# Altium PCB KUOZHAN.PCBDOC (part 12 of 21)
Units mm, origin at the board's own origin, x right, y up, seen from the top; angles counter-clockwise.
Board outline 165.51 x 116.38 mm, 2 copper layers (Top Layer, Bottom Layer); 171 components, 245 nets, 894 pads, 298 vias.
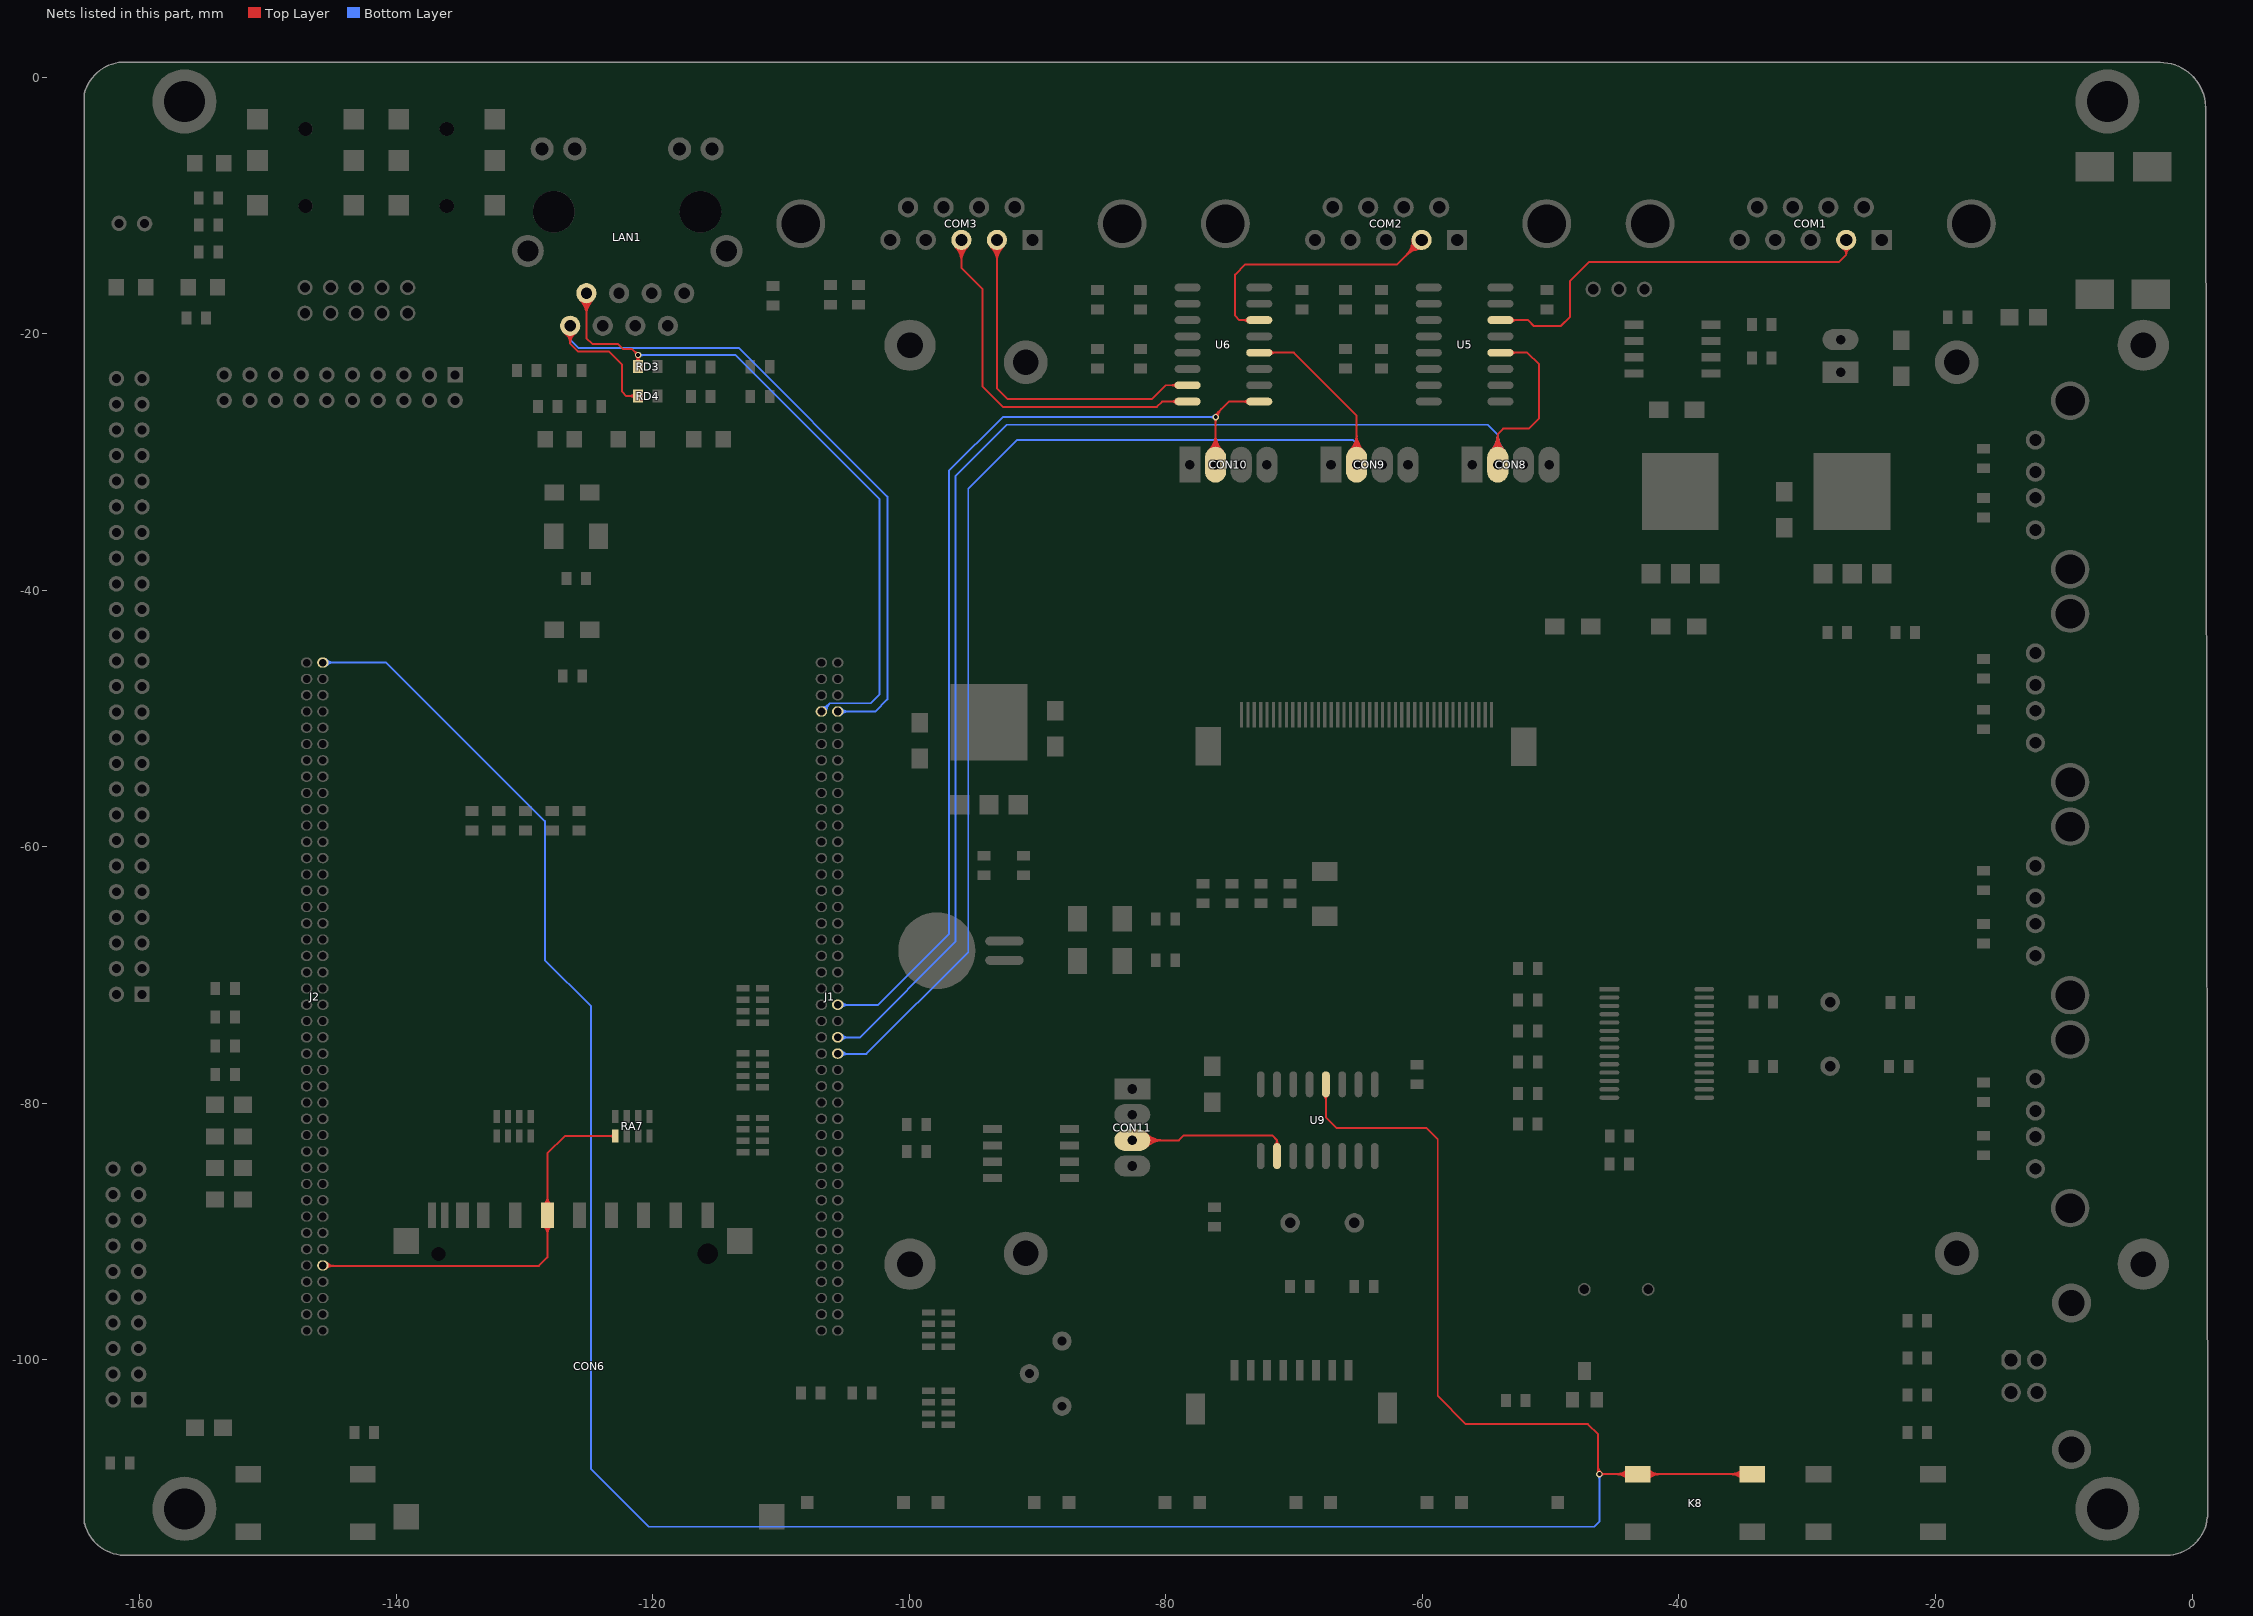
[diagram p12: the nets of this part, all layers, seen from the top]

## Via types
v1: diameter 0.5, hole 0.3, Top Layer to Bottom Layer, 272 vias
v2: diameter 0.6, hole 0.3, Top Layer to Bottom Layer, 24 vias
v3: diameter 0.9, hole 0.9, Top Layer to Bottom Layer, 2 vias

## Nets (pads, with @x,y where several pads share a name; then routed paths per layer and width w, separated by ;. In a path a pad name is that pad's centre, name@x,y a point inside that pad or via, vN(x,y) a via of type N, cw(c..) or ccw(c..) an arc to the next point about the centre after c; other vN are vias at no path point) (continued)
RSRXD2: COM3.3 U6.8 | length 65.3
  Top Layer w0.15: COM3.3@-95.928,-12.692 -95.928,-14.872 -94.3,-16.5 -94.3,-24.1 -92.7,-25.7 -80.7,-25.7 -80.29,-25.29 U6.8@-78.3,-25.29 ; COM3.3@-96.431,-13.196 cw(c-97.647,-14.412) -95.928,-14.412 ; COM3.3@-96.431,-13.196 cw(c-97.647,-14.412) -95.928,-14.412 ; COM3.3@-96.431,-13.196 cw(c-97.647,-14.412) -95.928,-14.412 ; COM3.3@-96.431,-13.196 cw(c-97.647,-14.412) -95.928,-14.412 ; COM3.3@-96.431,-13.196 cw(c-97.647,-14.412) -95.928,-14.412 ; COM3.3@-96.325,-13.09 cw(c-97.285,-14.05) -95.928,-14.05 ; COM3.3@-96.325,-13.09 cw(c-97.285,-14.05) -95.928,-14.05 ; COM3.3@-96.325,-13.09 cw(c-97.285,-14.05) -95.928,-14.05 ; COM3.3@-96.325,-13.09 cw(c-97.285,-14.05) -95.928,-14.05 ; COM3.3@-96.325,-13.09 cw(c-97.285,-14.05) -95.928,-14.05 ; COM3.3@-96.219,-12.984 cw(c-96.923,-13.688) -95.928,-13.688 ; COM3.3@-96.219,-12.984 cw(c-96.923,-13.688) -95.928,-13.688 ; COM3.3@-96.219,-12.984 cw(c-96.923,-13.688) -95.928,-13.688 ; COM3.3@-96.219,-12.984 cw(c-96.923,-13.688) -95.928,-13.688 ; COM3.3@-96.219,-12.984 cw(c-96.923,-13.688) -95.928,-13.688 ; -95.928,-14.412 cw(c-94.208,-14.412) COM3.3@-95.424,-13.196 ; -95.928,-14.412 cw(c-94.208,-14.412) COM3.3@-95.424,-13.196 ; -95.928,-14.412 cw(c-94.208,-14.412) COM3.3@-95.424,-13.196 ; -95.928,-14.412 cw(c-94.208,-14.412) COM3.3@-95.424,-13.196 ; -95.928,-14.412 cw(c-94.208,-14.412) COM3.3@-95.424,-13.196 ; -95.928,-14.05 cw(c-94.57,-14.05) COM3.3@-95.53,-13.09 ; -95.928,-14.05 cw(c-94.57,-14.05) COM3.3@-95.53,-13.09 ; -95.928,-14.05 cw(c-94.57,-14.05) COM3.3@-95.53,-13.09 ; -95.928,-14.05 cw(c-94.57,-14.05) COM3.3@-95.53,-13.09 ; -95.928,-14.05 cw(c-94.57,-14.05) COM3.3@-95.53,-13.09 ; -95.928,-13.688 cw(c-94.932,-13.688) COM3.3@-95.636,-12.984 ; -95.928,-13.688 cw(c-94.932,-13.688) COM3.3@-95.636,-12.984 ; -95.928,-13.688 cw(c-94.932,-13.688) COM3.3@-95.636,-12.984 ; -95.928,-13.688 cw(c-94.932,-13.688) COM3.3@-95.636,-12.984 ; -95.928,-13.688 cw(c-94.932,-13.688) COM3.3@-95.636,-12.984 ; -79.566,-25.29 cw(c-79.566,-25.845) U6.8@-79.174,-25.452 ; -79.566,-25.29 ccw(c-79.566,-24.735) U6.8@-79.174,-25.128 ; -79.566,-25.29 cw(c-79.566,-25.845) U6.8@-79.174,-25.452 ; -79.566,-25.29 ccw(c-79.566,-24.735) U6.8@-79.174,-25.128 ; -79.566,-25.29 cw(c-79.566,-25.845) U6.8@-79.174,-25.452 ; -79.566,-25.29 ccw(c-79.566,-24.735) U6.8@-79.174,-25.128 ; -79.566,-25.29 cw(c-79.566,-25.845) U6.8@-79.174,-25.452 ; -79.566,-25.29 ccw(c-79.566,-24.735) U6.8@-79.174,-25.128 ; -79.566,-25.29 ccw(c-79.566,-24.735) U6.8@-79.174,-25.128 ; -79.566,-25.29 cw(c-79.566,-25.845) U6.8@-79.174,-25.452
RST_KEY: J2.2 K8.1 K8.2 U9.12 | length 246.7
  Top Layer w0.15: U9.12@-67.682,-79.386 cw(c-68.075,-79.778) -67.52,-79.778 cw(c-66.965,-79.778) U9.12@-67.358,-79.386 ; U9.12@-67.52,-78.512 -67.52,-81.08 -66.7,-81.9 -59.7,-81.9 -58.8,-82.8 -58.8,-102.8 -56.6,-105 -47.1,-105 -46.3,-105.8 -46.3,-108.9 K8.1@-43.2,-108.9 K8.2@-34.275,-108.9 ; -46.3,-108.598 ccw(c-45.898,-108.598) v1@-46.182,-108.882 ; -46.3,-108.236 ccw(c-45.536,-108.236) -46.076,-108.776 ccw(c-45.778,-108.478) -45.778,-108.9 ccw(c-45.778,-109.322) v1@-46.076,-109.024 ; K8.1@-43.957,-109.307 ccw(c-44.938,-110.288) -44.938,-108.9 ccw(c-44.938,-107.512) K8.1@-43.957,-108.493 ; K8.1@-43.851,-109.201 ccw(c-44.576,-109.926) -44.576,-108.9 ccw(c-44.576,-107.874) K8.1@-43.851,-108.599 ; K8.1@-43.744,-109.094 ccw(c-44.214,-109.564) -44.214,-108.9 ccw(c-44.214,-108.236) K8.1@-43.744,-108.706 ; K8.1@-42.656,-109.094 cw(c-42.186,-109.564) -42.186,-108.9 cw(c-42.186,-108.236) K8.1@-42.656,-108.706 ; K8.1@-42.549,-109.201 cw(c-41.824,-109.926) -41.824,-108.9 cw(c-41.824,-107.874) K8.1@-42.549,-108.599 ; K8.1@-42.443,-109.307 cw(c-41.462,-110.288) -41.462,-108.9 cw(c-41.462,-107.512) K8.1@-42.443,-108.493 ; K8.2@-35.031,-109.307 ccw(c-36.013,-110.288) -36.013,-108.9 ccw(c-36.013,-107.512) K8.2@-35.031,-108.493 ; K8.2@-34.925,-109.201 ccw(c-35.651,-109.926) -35.651,-108.9 ccw(c-35.651,-107.874) K8.2@-34.925,-108.599 ; K8.2@-34.819,-109.094 ccw(c-35.289,-109.564) -35.289,-108.9 ccw(c-35.289,-108.236) K8.2@-34.819,-108.706
  Bottom Layer w0.15: J2.2@-145.703,-45.638 -140.762,-45.638 -128.4,-58 -128.4,-68.838 -124.8,-72.438 -124.8,-108.5 -120.3,-113 -46.6,-113 -46.2,-112.6 v1(-46.2,-108.9) ; v1@-46.324,-109.024 cw(c-46.622,-109.322) -46.2,-109.322 cw(c-45.778,-109.322) v1@-46.076,-109.024 ; J2.2@-145.579,-45.762 cw(c-145.28,-46.061) J2.2@-145.28,-45.638 ; J2.2@-145.579,-45.762 cw(c-145.28,-46.061) J2.2@-145.28,-45.638 ; J2.2@-145.579,-45.762 cw(c-145.28,-46.061) J2.2@-145.28,-45.638 ; J2.2@-145.579,-45.515 ccw(c-145.28,-45.216) J2.2@-145.28,-45.638 ; J2.2@-145.579,-45.515 ccw(c-145.28,-45.216) J2.2@-145.28,-45.638 ; J2.2@-145.579,-45.515 ccw(c-145.28,-45.216) J2.2@-145.28,-45.638 ; J2.2@-145.473,-45.868 cw(c-144.918,-46.423) -144.918,-45.638 ; J2.2@-145.473,-45.868 cw(c-144.918,-46.423) -144.918,-45.638 ; J2.2@-145.473,-45.868 cw(c-144.918,-46.423) -144.918,-45.638 ; J2.2@-145.473,-45.409 ccw(c-144.918,-44.854) -144.918,-45.638 ; J2.2@-145.473,-45.409 ccw(c-144.918,-44.854) -144.918,-45.638 ; J2.2@-145.473,-45.409 ccw(c-144.918,-44.854) -144.918,-45.638 ; J2.2@-145.529,-45.763 cw(c-145.228,-46.064) -145.228,-45.638 ccw(c-145.228,-46.064) J2.2@-145.529,-45.763 ; J2.2@-145.529,-45.516 ccw(c-145.233,-45.219) -145.233,-45.638 cw(c-145.233,-45.219) J2.2@-145.529,-45.516 ; J2.2@-145.423,-45.869 cw(c-144.866,-46.426) -144.866,-45.638 ccw(c-144.866,-46.426) J2.2@-145.423,-45.869 ; J2.2@-145.423,-45.41 ccw(c-144.871,-44.857) -144.871,-45.638 cw(c-144.871,-44.857) J2.2@-145.423,-45.41
RSTXD0: COM1.2 U5.14 | length 48.4
  Top Layer w0.15: U5.14@-53.912,-18.94 -51.76,-18.94 -51.3,-19.4 -49.2,-19.4 -48.5,-18.7 -48.5,-15.9 -47,-14.4 -27.5,-14.4 -26.959,-13.859 ; COM1.2@-26.959,-12.692 -26.959,-13.859 ; U5.14@-53.038,-19.102 cw(c-52.646,-19.495) -52.646,-18.94 ; U5.14@-53.038,-19.102 cw(c-52.646,-19.495) -52.646,-18.94 ; U5.14@-53.038,-19.102 cw(c-52.646,-19.495) -52.646,-18.94 ; U5.14@-53.038,-19.102 cw(c-52.646,-19.495) -52.646,-18.94 ; U5.14@-53.038,-19.102 cw(c-52.646,-19.495) -52.646,-18.94 ; U5.14@-53.038,-18.778 ccw(c-52.646,-18.385) -52.646,-18.94 ; U5.14@-53.038,-18.778 ccw(c-52.646,-18.385) -52.646,-18.94 ; U5.14@-53.038,-18.778 ccw(c-52.646,-18.385) -52.646,-18.94 ; U5.14@-53.038,-18.778 ccw(c-52.646,-18.385) -52.646,-18.94 ; U5.14@-53.038,-18.778 ccw(c-52.646,-18.385) -52.646,-18.94 ; COM1.2@-27.285,-13.326 cw(c-27.559,-13.859) -26.959,-13.859 ; COM1.2@-27.285,-13.326 cw(c-27.559,-13.859) -26.959,-13.859 ; COM1.2@-27.285,-13.326 cw(c-27.559,-13.859) -26.959,-13.859 ; COM1.2@-27.285,-13.326 cw(c-27.559,-13.859) -26.959,-13.859 ; COM1.2@-27.285,-13.326 cw(c-27.559,-13.859) -26.959,-13.859 ; COM1.2@-27.216,-13.192 cw(c-27.432,-13.613) -26.959,-13.613 ; COM1.2@-27.216,-13.192 cw(c-27.432,-13.613) -26.959,-13.613 ; COM1.2@-27.216,-13.192 cw(c-27.432,-13.613) -26.959,-13.613 ; COM1.2@-27.216,-13.192 cw(c-27.432,-13.613) -26.959,-13.613 ; COM1.2@-27.216,-13.192 cw(c-27.432,-13.613) -26.959,-13.613 ; -26.959,-13.859 cw(c-26.359,-13.859) COM1.2@-26.633,-13.326 ; -26.959,-13.859 cw(c-26.359,-13.859) COM1.2@-26.633,-13.326 ; -26.959,-13.859 cw(c-26.359,-13.859) COM1.2@-26.633,-13.326 ; -26.959,-13.859 cw(c-26.359,-13.859) COM1.2@-26.633,-13.326 ; -26.959,-13.859 cw(c-26.359,-13.859) COM1.2@-26.633,-13.326 ; -26.959,-13.613 cw(c-26.486,-13.613) COM1.2@-26.702,-13.192 ; -26.959,-13.613 cw(c-26.486,-13.613) COM1.2@-26.702,-13.192 ; -26.959,-13.613 cw(c-26.486,-13.613) COM1.2@-26.702,-13.192 ; -26.959,-13.613 cw(c-26.486,-13.613) COM1.2@-26.702,-13.192 ; -26.959,-13.613 cw(c-26.486,-13.613) COM1.2@-26.702,-13.192
RSTXD1: COM2.2 U6.14 | length 57.2
  Top Layer w0.15: U6.14@-72.712,-18.94 -74.26,-18.94 -74.6,-18.6 -74.6,-15.4 -73.797,-14.597 -61.964,-14.597 COM2.2@-60.059,-12.692 ; -73.978,-18.94 cw(c-73.978,-19.495) U6.14@-73.586,-19.102 ; -73.978,-18.94 ccw(c-73.978,-18.385) U6.14@-73.586,-18.778 ; -73.978,-18.94 cw(c-73.978,-19.495) U6.14@-73.586,-19.102 ; -73.978,-18.94 ccw(c-73.978,-18.385) U6.14@-73.586,-18.778 ; -73.978,-18.94 cw(c-73.978,-19.495) U6.14@-73.586,-19.102 ; -73.978,-18.94 ccw(c-73.978,-18.385) U6.14@-73.586,-18.778 ; -73.978,-18.94 cw(c-73.978,-19.495) U6.14@-73.586,-19.102 ; -73.978,-18.94 ccw(c-73.978,-18.385) U6.14@-73.586,-18.778 ; -73.978,-18.94 ccw(c-73.978,-18.385) U6.14@-73.586,-18.778 ; -73.978,-18.94 cw(c-73.978,-19.495) U6.14@-73.586,-19.102 ; -61.275,-13.908 cw(c-60.059,-15.124) COM2.2@-60.059,-13.404 ; -61.275,-13.908 ccw(c-62.491,-12.692) COM2.2@-60.771,-12.692 ; -61.275,-13.908 cw(c-60.059,-15.124) COM2.2@-60.059,-13.404 ; -61.275,-13.908 ccw(c-62.491,-12.692) COM2.2@-60.771,-12.692 ; -61.275,-13.908 cw(c-60.059,-15.124) COM2.2@-60.059,-13.404 ; -61.275,-13.908 ccw(c-62.491,-12.692) COM2.2@-60.771,-12.692 ; -61.275,-13.908 cw(c-60.059,-15.124) COM2.2@-60.059,-13.404 ; -61.275,-13.908 ccw(c-62.491,-12.692) COM2.2@-60.771,-12.692 ; -61.275,-13.908 ccw(c-62.491,-12.692) COM2.2@-60.771,-12.692 ; -61.275,-13.908 cw(c-60.059,-15.124) COM2.2@-60.059,-13.404 ; -61.019,-13.652 cw(c-60.059,-14.612) COM2.2@-60.059,-13.254 ; -61.019,-13.652 ccw(c-61.979,-12.692) COM2.2@-60.621,-12.692 ; -61.019,-13.652 cw(c-60.059,-14.612) COM2.2@-60.059,-13.254 ; -61.019,-13.652 ccw(c-61.979,-12.692) COM2.2@-60.621,-12.692 ; -61.019,-13.652 cw(c-60.059,-14.612) COM2.2@-60.059,-13.254 ; -61.019,-13.652 ccw(c-61.979,-12.692) COM2.2@-60.621,-12.692 ; -61.019,-13.652 cw(c-60.059,-14.612) COM2.2@-60.059,-13.254 ; -61.019,-13.652 ccw(c-61.979,-12.692) COM2.2@-60.621,-12.692 ; -61.019,-13.652 ccw(c-61.979,-12.692) COM2.2@-60.621,-12.692 ; -61.019,-13.652 cw(c-60.059,-14.612) COM2.2@-60.059,-13.254 ; -60.763,-13.396 cw(c-60.059,-14.1) COM2.2@-60.059,-13.104 ; -60.763,-13.396 ccw(c-61.467,-12.692) COM2.2@-60.471,-12.692 ; -60.763,-13.396 cw(c-60.059,-14.1) COM2.2@-60.059,-13.104 ; -60.763,-13.396 ccw(c-61.467,-12.692) COM2.2@-60.471,-12.692 ; -60.763,-13.396 cw(c-60.059,-14.1) COM2.2@-60.059,-13.104 ; -60.763,-13.396 ccw(c-61.467,-12.692) COM2.2@-60.471,-12.692 ; -60.763,-13.396 cw(c-60.059,-14.1) COM2.2@-60.059,-13.104 ; -60.763,-13.396 ccw(c-61.467,-12.692) COM2.2@-60.471,-12.692 ; -60.763,-13.396 ccw(c-61.467,-12.692) COM2.2@-60.471,-12.692 ; -60.763,-13.396 cw(c-60.059,-14.1) COM2.2@-60.059,-13.104
RSTXD2: COM3.2 U6.7 | length 63.6
  Top Layer w0.15: COM3.2@-93.159,-12.692 -93.159,-24.241 -92.3,-25.1 -81.1,-25.1 -80.02,-24.02 U6.7@-78.3,-24.02 ; COM3.2@-93.663,-13.196 cw(c-94.879,-14.412) -93.159,-14.412 ; COM3.2@-93.663,-13.196 cw(c-94.879,-14.412) -93.159,-14.412 ; COM3.2@-93.663,-13.196 cw(c-94.879,-14.412) -93.159,-14.412 ; COM3.2@-93.663,-13.196 cw(c-94.879,-14.412) -93.159,-14.412 ; COM3.2@-93.663,-13.196 cw(c-94.879,-14.412) -93.159,-14.412 ; COM3.2@-93.557,-13.09 cw(c-94.517,-14.05) -93.159,-14.05 ; COM3.2@-93.557,-13.09 cw(c-94.517,-14.05) -93.159,-14.05 ; COM3.2@-93.557,-13.09 cw(c-94.517,-14.05) -93.159,-14.05 ; COM3.2@-93.557,-13.09 cw(c-94.517,-14.05) -93.159,-14.05 ; COM3.2@-93.557,-13.09 cw(c-94.517,-14.05) -93.159,-14.05 ; COM3.2@-93.451,-12.984 cw(c-94.155,-13.688) -93.159,-13.688 ; COM3.2@-93.451,-12.984 cw(c-94.155,-13.688) -93.159,-13.688 ; COM3.2@-93.451,-12.984 cw(c-94.155,-13.688) -93.159,-13.688 ; COM3.2@-93.451,-12.984 cw(c-94.155,-13.688) -93.159,-13.688 ; COM3.2@-93.451,-12.984 cw(c-94.155,-13.688) -93.159,-13.688 ; -93.159,-14.412 cw(c-91.439,-14.412) COM3.2@-92.655,-13.196 ; -93.159,-14.412 cw(c-91.439,-14.412) COM3.2@-92.655,-13.196 ; -93.159,-14.412 cw(c-91.439,-14.412) COM3.2@-92.655,-13.196 ; -93.159,-14.412 cw(c-91.439,-14.412) COM3.2@-92.655,-13.196 ; -93.159,-14.412 cw(c-91.439,-14.412) COM3.2@-92.655,-13.196 ; -93.159,-14.05 cw(c-91.801,-14.05) COM3.2@-92.761,-13.09 ; -93.159,-14.05 cw(c-91.801,-14.05) COM3.2@-92.761,-13.09 ; -93.159,-14.05 cw(c-91.801,-14.05) COM3.2@-92.761,-13.09 ; -93.159,-14.05 cw(c-91.801,-14.05) COM3.2@-92.761,-13.09 ; -93.159,-14.05 cw(c-91.801,-14.05) COM3.2@-92.761,-13.09 ; -93.159,-13.688 cw(c-92.163,-13.688) COM3.2@-92.867,-12.984 ; -93.159,-13.688 cw(c-92.163,-13.688) COM3.2@-92.867,-12.984 ; -93.159,-13.688 cw(c-92.163,-13.688) COM3.2@-92.867,-12.984 ; -93.159,-13.688 cw(c-92.163,-13.688) COM3.2@-92.867,-12.984 ; -93.159,-13.688 cw(c-92.163,-13.688) COM3.2@-92.867,-12.984 ; -79.566,-24.02 cw(c-79.566,-24.575) U6.7@-79.174,-24.182 ; -79.566,-24.02 ccw(c-79.566,-23.465) U6.7@-79.174,-23.858 ; -79.566,-24.02 cw(c-79.566,-24.575) U6.7@-79.174,-24.182 ; -79.566,-24.02 ccw(c-79.566,-23.465) U6.7@-79.174,-23.858 ; -79.566,-24.02 cw(c-79.566,-24.575) U6.7@-79.174,-24.182 ; -79.566,-24.02 ccw(c-79.566,-23.465) U6.7@-79.174,-23.858 ; -79.566,-24.02 cw(c-79.566,-24.575) U6.7@-79.174,-24.182 ; -79.566,-24.02 ccw(c-79.566,-23.465) U6.7@-79.174,-23.858 ; -79.566,-24.02 ccw(c-79.566,-23.465) U6.7@-79.174,-23.858 ; -79.566,-24.02 cw(c-79.566,-24.575) U6.7@-79.174,-24.182
RX+: J1.8 LAN1.8 RD4.2 | length 108.1
  Top Layer w0.15: LAN1.8@-126.428,-19.384 -126.428,-20.772 ; RD4.2@-121.137,-24.86 -122.04,-24.86 -122.383,-24.517 -122.383,-22.417 -123.4,-21.4 -125.8,-21.4 -126.428,-20.772 ; LAN1.8@-126.843,-19.963 cw(c-127.424,-20.772) -126.428,-20.772 ; LAN1.8@-126.843,-19.963 cw(c-127.424,-20.772) -126.428,-20.772 ; LAN1.8@-126.843,-19.963 cw(c-127.424,-20.772) -126.428,-20.772 ; LAN1.8@-126.843,-19.963 cw(c-127.424,-20.772) -126.428,-20.772 ; LAN1.8@-126.843,-19.963 cw(c-127.424,-20.772) -126.428,-20.772 ; LAN1.8@-126.756,-19.841 cw(c-127.214,-20.48) -126.428,-20.48 ; LAN1.8@-126.756,-19.841 cw(c-127.214,-20.48) -126.428,-20.48 ; LAN1.8@-126.756,-19.841 cw(c-127.214,-20.48) -126.428,-20.48 ; LAN1.8@-126.756,-19.841 cw(c-127.214,-20.48) -126.428,-20.48 ; LAN1.8@-126.756,-19.841 cw(c-127.214,-20.48) -126.428,-20.48 ; LAN1.8@-126.668,-19.719 cw(c-127.005,-20.187) -126.428,-20.187 ; LAN1.8@-126.668,-19.719 cw(c-127.005,-20.187) -126.428,-20.187 ; LAN1.8@-126.668,-19.719 cw(c-127.005,-20.187) -126.428,-20.187 ; LAN1.8@-126.668,-19.719 cw(c-127.005,-20.187) -126.428,-20.187 ; LAN1.8@-126.668,-19.719 cw(c-127.005,-20.187) -126.428,-20.187 ; -126.428,-20.772 cw(c-125.432,-20.772) LAN1.8@-126.013,-19.963 ; -126.428,-20.772 cw(c-125.432,-20.772) LAN1.8@-126.013,-19.963 ; -126.428,-20.772 cw(c-125.432,-20.772) LAN1.8@-126.013,-19.963 ; -126.428,-20.772 cw(c-125.432,-20.772) LAN1.8@-126.013,-19.963 ; -126.428,-20.772 cw(c-125.432,-20.772) LAN1.8@-126.013,-19.963 ; -126.428,-20.48 cw(c-125.642,-20.48) LAN1.8@-126.1,-19.841 ; -126.428,-20.48 cw(c-125.642,-20.48) LAN1.8@-126.1,-19.841 ; -126.428,-20.48 cw(c-125.642,-20.48) LAN1.8@-126.1,-19.841 ; -126.428,-20.48 cw(c-125.642,-20.48) LAN1.8@-126.1,-19.841 ; -126.428,-20.48 cw(c-125.642,-20.48) LAN1.8@-126.1,-19.841 ; -126.428,-20.187 cw(c-125.851,-20.187) LAN1.8@-126.188,-19.719 ; -126.428,-20.187 cw(c-125.851,-20.187) LAN1.8@-126.188,-19.719 ; -126.428,-20.187 cw(c-125.851,-20.187) LAN1.8@-126.188,-19.719 ; -126.428,-20.187 cw(c-125.851,-20.187) LAN1.8@-126.188,-19.719 ; -126.428,-20.187 cw(c-125.851,-20.187) LAN1.8@-126.188,-19.719 ; -121.875,-24.86 cw(c-121.875,-25.598) RD4.2@-121.353,-25.076 ; -121.875,-24.86 ccw(c-121.875,-24.121) RD4.2@-121.353,-24.643 ; -121.875,-24.86 cw(c-121.875,-25.598) RD4.2@-121.353,-25.076 ; -121.875,-24.86 ccw(c-121.875,-24.121) RD4.2@-121.353,-24.643 ; -121.875,-24.86 cw(c-121.875,-25.598) RD4.2@-121.353,-25.076 ; -121.875,-24.86 ccw(c-121.875,-24.121) RD4.2@-121.353,-24.643 ; -121.875,-24.86 cw(c-121.875,-25.598) RD4.2@-121.353,-25.076 ; -121.875,-24.86 ccw(c-121.875,-24.121) RD4.2@-121.353,-24.643 ; -121.875,-24.86 ccw(c-121.875,-24.121) RD4.2@-121.353,-24.643 ; -121.875,-24.86 cw(c-121.875,-25.598) RD4.2@-121.353,-25.076
  Bottom Layer w0.15: LAN1.8@-126.428,-19.384 -126.428,-20.472 -125.8,-21.1 -113.3,-21.1 -101.7,-32.7 -101.7,-48.5 -102.651,-49.451 J1.8@-105.571,-49.449 ; LAN1.8@-126.713,-20.037 cw(c-126.903,-20.472) -126.428,-20.472 ; LAN1.8@-126.713,-20.037 cw(c-126.903,-20.472) -126.428,-20.472 ; LAN1.8@-126.713,-20.037 cw(c-126.903,-20.472) -126.428,-20.472 ; LAN1.8@-126.713,-20.037 cw(c-126.903,-20.472) -126.428,-20.472 ; LAN1.8@-126.713,-20.037 cw(c-126.903,-20.472) -126.428,-20.472 ; LAN1.8@-126.653,-19.899 cw(c-126.803,-20.243) -126.428,-20.243 ; LAN1.8@-126.653,-19.899 cw(c-126.803,-20.243) -126.428,-20.243 ; LAN1.8@-126.653,-19.899 cw(c-126.803,-20.243) -126.428,-20.243 ; LAN1.8@-126.653,-19.899 cw(c-126.803,-20.243) -126.428,-20.243 ; LAN1.8@-126.653,-19.899 cw(c-126.803,-20.243) -126.428,-20.243 ; -126.428,-20.472 cw(c-125.953,-20.472) LAN1.8@-126.143,-20.037 ; -126.428,-20.472 cw(c-125.953,-20.472) LAN1.8@-126.143,-20.037 ; -126.428,-20.472 cw(c-125.953,-20.472) LAN1.8@-126.143,-20.037 ; -126.428,-20.472 cw(c-125.953,-20.472) LAN1.8@-126.143,-20.037 ; -126.428,-20.472 cw(c-125.953,-20.472) LAN1.8@-126.143,-20.037 ; -126.428,-20.243 cw(c-126.053,-20.243) LAN1.8@-126.203,-19.899 ; -126.428,-20.243 cw(c-126.053,-20.243) LAN1.8@-126.203,-19.899 ; -126.428,-20.243 cw(c-126.053,-20.243) LAN1.8@-126.203,-19.899 ; -126.428,-20.243 cw(c-126.053,-20.243) LAN1.8@-126.203,-19.899 ; -126.428,-20.243 cw(c-126.053,-20.243) LAN1.8@-126.203,-19.899 ; J1.8@-105.447,-49.575 cw(c-105.148,-49.874) J1.8@-105.148,-49.451 ; J1.8@-105.447,-49.575 cw(c-105.148,-49.874) J1.8@-105.148,-49.451 ; J1.8@-105.447,-49.575 cw(c-105.148,-49.874) J1.8@-105.148,-49.451 ; J1.8@-105.447,-49.327 ccw(c-105.148,-49.029) J1.8@-105.148,-49.451 ; J1.8@-105.447,-49.327 ccw(c-105.148,-49.029) J1.8@-105.148,-49.451 ; J1.8@-105.447,-49.327 ccw(c-105.148,-49.029) J1.8@-105.148,-49.451 ; J1.8@-105.341,-49.681 cw(c-104.786,-50.236) -104.786,-49.451 ; J1.8@-105.341,-49.681 cw(c-104.786,-50.236) -104.786,-49.451 ; J1.8@-105.341,-49.681 cw(c-104.786,-50.236) -104.786,-49.451 ; J1.8@-105.341,-49.221 ccw(c-104.786,-48.666) -104.786,-49.451 ; J1.8@-105.341,-49.221 ccw(c-104.786,-48.666) -104.786,-49.451 ; J1.8@-105.341,-49.221 ccw(c-104.786,-48.666) -104.786,-49.451 ; J1.8@-105.397,-49.573 cw(c-105.102,-49.868) -105.102,-49.451 ccw(c-105.102,-49.868) J1.8@-105.397,-49.573 ; J1.8@-105.397,-49.326 ccw(c-105.094,-49.023) -105.094,-49.451 cw(c-105.094,-49.023) J1.8@-105.397,-49.326 ; J1.8@-105.291,-49.679 cw(c-104.74,-50.23) -104.74,-49.451 ccw(c-104.74,-50.23) J1.8@-105.291,-49.679 ; J1.8@-105.291,-49.22 ccw(c-104.732,-48.661) -104.732,-49.451 cw(c-104.732,-48.661) J1.8@-105.291,-49.22
RX-: J1.7 LAN1.7 RD3.2 | length 108.9
  Top Layer w0.15: LAN1.7@-125.158,-16.844 -125.158,-20.342 -124.7,-20.8 -122.7,-20.8 -122.3,-21.2 -121.6,-21.2 v1(-121.137,-21.663) RD3.2@-121.137,-22.56 ; v1@-121.262,-21.663 ccw(c-121.563,-21.663) -121.35,-21.45 ccw(c-121.137,-21.237) v1@-121.137,-21.538 ; v1@-121.225,-21.752 cw(c-121.438,-21.965) -121.137,-21.965 cw(c-120.835,-21.965) v1@-121.048,-21.752 ; LAN1.7@-125.662,-17.348 cw(c-126.878,-18.564) -125.158,-18.564 ; LAN1.7@-125.662,-17.348 cw(c-126.878,-18.564) -125.158,-18.564 ; LAN1.7@-125.662,-17.348 cw(c-126.878,-18.564) -125.158,-18.564 ; LAN1.7@-125.662,-17.348 cw(c-126.878,-18.564) -125.158,-18.564 ; LAN1.7@-125.662,-17.348 cw(c-126.878,-18.564) -125.158,-18.564 ; LAN1.7@-125.556,-17.241 cw(c-126.516,-18.202) -125.158,-18.202 ; LAN1.7@-125.556,-17.241 cw(c-126.516,-18.202) -125.158,-18.202 ; LAN1.7@-125.556,-17.241 cw(c-126.516,-18.202) -125.158,-18.202 ; LAN1.7@-125.556,-17.241 cw(c-126.516,-18.202) -125.158,-18.202 ; LAN1.7@-125.556,-17.241 cw(c-126.516,-18.202) -125.158,-18.202 ; LAN1.7@-125.45,-17.135 cw(c-126.154,-17.839) -125.158,-17.839 ; LAN1.7@-125.45,-17.135 cw(c-126.154,-17.839) -125.158,-17.839 ; LAN1.7@-125.45,-17.135 cw(c-126.154,-17.839) -125.158,-17.839 ; LAN1.7@-125.45,-17.135 cw(c-126.154,-17.839) -125.158,-17.839 ; LAN1.7@-125.45,-17.135 cw(c-126.154,-17.839) -125.158,-17.839 ; -125.158,-18.564 cw(c-123.438,-18.564) LAN1.7@-124.654,-17.348 ; -125.158,-18.564 cw(c-123.438,-18.564) LAN1.7@-124.654,-17.348 ; -125.158,-18.564 cw(c-123.438,-18.564) LAN1.7@-124.654,-17.348 ; -125.158,-18.564 cw(c-123.438,-18.564) LAN1.7@-124.654,-17.348 ; -125.158,-18.564 cw(c-123.438,-18.564) LAN1.7@-124.654,-17.348 ; -125.158,-18.202 cw(c-123.8,-18.202) LAN1.7@-124.76,-17.241 ; -125.158,-18.202 cw(c-123.8,-18.202) LAN1.7@-124.76,-17.241 ; -125.158,-18.202 cw(c-123.8,-18.202) LAN1.7@-124.76,-17.241 ; -125.158,-18.202 cw(c-123.8,-18.202) LAN1.7@-124.76,-17.241 ; -125.158,-18.202 cw(c-123.8,-18.202) LAN1.7@-124.76,-17.241 ; -125.158,-17.839 cw(c-124.162,-17.839) LAN1.7@-124.866,-17.135 ; -125.158,-17.839 cw(c-124.162,-17.839) LAN1.7@-124.866,-17.135 ; -125.158,-17.839 cw(c-124.162,-17.839) LAN1.7@-124.866,-17.135 ; -125.158,-17.839 cw(c-124.162,-17.839) LAN1.7@-124.866,-17.135 ; -125.158,-17.839 cw(c-124.162,-17.839) LAN1.7@-124.866,-17.135 ; -121.435,-21.365 cw(c-121.734,-21.663) v1@-121.312,-21.663 ; -121.435,-21.365 ccw(c-121.137,-21.066) v1@-121.137,-21.488 ; -121.435,-21.365 cw(c-121.734,-21.663) v1@-121.312,-21.663 ; -121.435,-21.365 ccw(c-121.137,-21.066) v1@-121.137,-21.488 ; -121.435,-21.365 cw(c-121.734,-21.663) v1@-121.312,-21.663 ; -121.435,-21.365 ccw(c-121.137,-21.066) v1@-121.137,-21.488 ; -121.435,-21.365 ccw(c-121.137,-21.066) v1@-121.137,-21.488 ; -121.435,-21.365 cw(c-121.734,-21.663) v1@-121.312,-21.663 ; RD3.2@-121.353,-22.216 ccw(c-121.875,-21.694) v1@-121.137,-21.694 ; RD3.2@-121.353,-22.216 ccw(c-121.875,-21.694) v1@-121.137,-21.694 ; RD3.2@-121.353,-22.216 ccw(c-121.875,-21.694) v1@-121.137,-21.694 ; RD3.2@-121.353,-22.216 ccw(c-121.875,-21.694) v1@-121.137,-21.694 ; RD3.2@-121.353,-22.216 ccw(c-121.875,-21.694) v1@-121.137,-21.694 ; v1@-121.26,-21.787 cw(c-121.559,-22.086) RD3.2@-121.137,-22.086 ; v1@-121.26,-21.787 cw(c-121.559,-22.086) RD3.2@-121.137,-22.086 ; v1@-121.26,-21.787 cw(c-121.559,-22.086) RD3.2@-121.137,-22.086 ; v1@-121.26,-21.787 cw(c-121.559,-22.086) RD3.2@-121.137,-22.086 ; RD3.2@-121.137,-22.086 cw(c-120.714,-22.086) v1@-121.013,-21.787 ; RD3.2@-121.137,-22.086 cw(c-120.714,-22.086) v1@-121.013,-21.787 ; RD3.2@-121.137,-22.086 cw(c-120.714,-22.086) v1@-121.013,-21.787 ; RD3.2@-121.137,-22.086 cw(c-120.714,-22.086) v1@-121.013,-21.787 ; v1@-121.137,-21.694 ccw(c-120.398,-21.694) RD3.2@-120.92,-22.216 ; v1@-121.137,-21.694 ccw(c-120.398,-21.694) RD3.2@-120.92,-22.216 ; v1@-121.137,-21.694 ccw(c-120.398,-21.694) RD3.2@-120.92,-22.216 ; v1@-121.137,-21.694 ccw(c-120.398,-21.694) RD3.2@-120.92,-22.216 ; v1@-121.137,-21.694 ccw(c-120.398,-21.694) RD3.2@-120.92,-22.216
  Bottom Layer w0.15: v1(-121.137,-21.663) -113.537,-21.663 -107.712,-27.488 -102.3,-32.9 -102.3,-48.1 -103.005,-48.805 -106.195,-48.805 J1.7@-106.841,-49.449 ; v1@-121.048,-21.752 cw(c-120.835,-21.965) -120.835,-21.663 cw(c-120.835,-21.362) v1@-121.048,-21.575 ; v1@-121.013,-21.787 cw(c-120.714,-22.086) -120.714,-21.663 ; v1@-121.013,-21.787 cw(c-120.714,-22.086) -120.714,-21.663 ; v1@-121.013,-21.787 cw(c-120.714,-22.086) -120.714,-21.663 ; v1@-121.013,-21.787 cw(c-120.714,-22.086) -120.714,-21.663 ; v1@-121.013,-21.54 ccw(c-120.714,-21.241) -120.714,-21.663 ; v1@-121.013,-21.54 ccw(c-120.714,-21.241) -120.714,-21.663 ; v1@-121.013,-21.54 ccw(c-120.714,-21.241) -120.714,-21.663 ; v1@-121.013,-21.54 ccw(c-120.714,-21.241) -120.714,-21.663 ; J1.7@-106.841,-49.276 ccw(c-106.841,-48.854) J1.7@-106.542,-49.152 ; J1.7@-106.841,-49.276 ccw(c-106.841,-48.854) J1.7@-106.542,-49.152 ; J1.7@-106.841,-49.276 ccw(c-106.841,-48.854) J1.7@-106.542,-49.152 ; J1.7@-106.841,-49.126 ccw(c-106.841,-48.341) -106.286,-48.896 ; J1.7@-106.841,-49.126 ccw(c-106.841,-48.341) -106.286,-48.896 ; J1.7@-106.841,-49.126 ccw(c-106.841,-48.341) -106.286,-48.896 ; J1.7@-106.666,-49.451 cw(c-106.243,-49.451) J1.7@-106.542,-49.152 ; J1.7@-106.666,-49.451 cw(c-106.243,-49.451) J1.7@-106.542,-49.152 ; J1.7@-106.666,-49.451 cw(c-106.243,-49.451) J1.7@-106.542,-49.152 ; J1.7@-106.516,-49.451 cw(c-105.731,-49.451) -106.286,-48.896 ; J1.7@-106.516,-49.451 cw(c-105.731,-49.451) -106.286,-48.896 ; J1.7@-106.516,-49.451 cw(c-105.731,-49.451) -106.286,-48.896 ; J1.7@-106.791,-49.124 ccw(c-106.791,-48.457) -106.319,-48.929 cw(c-106.791,-48.457) J1.7@-106.791,-49.124 ; J1.7@-106.616,-49.449 cw(c-106.077,-49.449) -106.458,-49.068 ccw(c-106.077,-49.449) J1.7@-106.616,-49.449 ; J1.7@-106.466,-49.449 cw(c-105.564,-49.449) -106.202,-48.812 ccw(c-105.564,-49.449) J1.7@-106.466,-49.449
RXD: CON11.3 U9.2 | length 20.4
  Top Layer w0.15: CON11.3@-82.61,-82.878 -78.978,-82.878 -78.6,-82.5 -71.7,-82.5 -71.33,-82.87 ; CON11.3@-81.717,-83.197 cw(c-80.947,-83.966) -80.947,-82.878 cw(c-80.947,-81.791) CON11.3@-81.717,-82.56 ; CON11.3@-81.61,-83.303 cw(c-80.585,-84.328) -80.585,-82.878 cw(c-80.585,-81.428) CON11.3@-81.61,-82.454 ; CON11.3@-81.504,-83.409 cw(c-80.223,-84.69) -80.223,-82.878 cw(c-80.223,-81.066) CON11.3@-81.504,-82.348 ; U9.2@-71.484,-83.219 ccw(c-71.801,-82.87) -71.33,-82.87 ; U9.2@-71.33,-84.1 -71.33,-82.87 ; U9.2@-71.176,-83.219 cw(c-70.859,-82.87) -71.33,-82.87
RXD0: CON8.2 J1.48 U5.12 | length 188.9
  Top Layer w0.15: CON8.2@-54.122,-30.21 -54.122,-27.822 -53.7,-27.4 -51.7,-27.4 -50.9,-26.6 -50.9,-22.4 -51.82,-21.48 U5.12@-53.912,-21.48 ; CON8.2@-54.652,-29.104 ccw(c-55.934,-27.823) -54.122,-27.823 ; CON8.2@-54.652,-29.104 ccw(c-55.934,-27.823) -54.122,-27.823 ; CON8.2@-54.652,-29.104 ccw(c-55.934,-27.823) -54.122,-27.823 ; CON8.2@-54.652,-29.104 ccw(c-55.934,-27.823) -54.122,-27.823 ; CON8.2@-54.652,-29.104 ccw(c-55.934,-27.823) -54.122,-27.823 ; CON8.2@-54.546,-29.21 ccw(c-55.572,-28.185) -54.122,-28.185 ; CON8.2@-54.546,-29.21 ccw(c-55.572,-28.185) -54.122,-28.185 ; CON8.2@-54.546,-29.21 ccw(c-55.572,-28.185) -54.122,-28.185 ; CON8.2@-54.546,-29.21 ccw(c-55.572,-28.185) -54.122,-28.185 ; CON8.2@-54.546,-29.21 ccw(c-55.572,-28.185) -54.122,-28.185 ; CON8.2@-54.44,-29.317 ccw(c-55.209,-28.547) -54.122,-28.547 ; CON8.2@-54.44,-29.317 ccw(c-55.209,-28.547) -54.122,-28.547 ; CON8.2@-54.44,-29.317 ccw(c-55.209,-28.547) -54.122,-28.547 ; CON8.2@-54.44,-29.317 ccw(c-55.209,-28.547) -54.122,-28.547 ; CON8.2@-54.44,-29.317 ccw(c-55.209,-28.547) -54.122,-28.547 ; -54.122,-28.547 ccw(c-53.034,-28.547) CON8.2@-53.803,-29.317 ; -54.122,-28.547 ccw(c-53.034,-28.547) CON8.2@-53.803,-29.317 ; -54.122,-28.547 ccw(c-53.034,-28.547) CON8.2@-53.803,-29.317 ; -54.122,-28.547 ccw(c-53.034,-28.547) CON8.2@-53.803,-29.317 ; -54.122,-28.547 ccw(c-53.034,-28.547) CON8.2@-53.803,-29.317 ; -54.122,-28.185 ccw(c-52.672,-28.185) CON8.2@-53.697,-29.21 ; -54.122,-28.185 ccw(c-52.672,-28.185) CON8.2@-53.697,-29.21 ; -54.122,-28.185 ccw(c-52.672,-28.185) CON8.2@-53.697,-29.21 ; -54.122,-28.185 ccw(c-52.672,-28.185) CON8.2@-53.697,-29.21 ; -54.122,-28.185 ccw(c-52.672,-28.185) CON8.2@-53.697,-29.21 ; -54.122,-27.823 ccw(c-52.31,-27.823) CON8.2@-53.591,-29.104 ; -54.122,-27.823 ccw(c-52.31,-27.823) CON8.2@-53.591,-29.104 ; -54.122,-27.823 ccw(c-52.31,-27.823) CON8.2@-53.591,-29.104 ; -54.122,-27.823 ccw(c-52.31,-27.823) CON8.2@-53.591,-29.104 ; -54.122,-27.823 ccw(c-52.31,-27.823) CON8.2@-53.591,-29.104 ; U5.12@-53.038,-21.642 cw(c-52.646,-22.035) -52.646,-21.48 ; U5.12@-53.038,-21.642 cw(c-52.646,-22.035) -52.646,-21.48 ; U5.12@-53.038,-21.642 cw(c-52.646,-22.035) -52.646,-21.48 ; U5.12@-53.038,-21.642 cw(c-52.646,-22.035) -52.646,-21.48 ; U5.12@-53.038,-21.642 cw(c-52.646,-22.035) -52.646,-21.48 ; U5.12@-53.038,-21.318 ccw(c-52.646,-20.925) -52.646,-21.48 ; U5.12@-53.038,-21.318 ccw(c-52.646,-20.925) -52.646,-21.48 ; U5.12@-53.038,-21.318 ccw(c-52.646,-20.925) -52.646,-21.48 ; U5.12@-53.038,-21.318 ccw(c-52.646,-20.925) -52.646,-21.48 ; U5.12@-53.038,-21.318 ccw(c-52.646,-20.925) -52.646,-21.48
  Bottom Layer w0.15: J1.48@-105.571,-74.869 -103.869,-74.869 -96.4,-67.4 -96.4,-31.1 -92.4,-27.1 -54.9,-27.1 -54.122,-27.878 ; CON8.2@-54.122,-30.21 -54.122,-27.878 ; J1.48@-105.447,-74.992 cw(c-105.148,-75.291) J1.48@-105.148,-74.869 ; J1.48@-105.447,-74.992 cw(c-105.148,-75.291) J1.48@-105.148,-74.869 ; J1.48@-105.447,-74.992 cw(c-105.148,-75.291) J1.48@-105.148,-74.869 ; J1.48@-105.447,-74.745 ccw(c-105.148,-74.446) J1.48@-105.148,-74.869 ; J1.48@-105.447,-74.745 ccw(c-105.148,-74.446) J1.48@-105.148,-74.869 ; J1.48@-105.447,-74.745 ccw(c-105.148,-74.446) J1.48@-105.148,-74.869 ; J1.48@-105.341,-75.098 cw(c-104.786,-75.653) -104.786,-74.869 ; J1.48@-105.341,-75.098 cw(c-104.786,-75.653) -104.786,-74.869 ; J1.48@-105.341,-75.098 cw(c-104.786,-75.653) -104.786,-74.869 ; J1.48@-105.341,-74.639 ccw(c-104.786,-74.084) -104.786,-74.869 ; J1.48@-105.341,-74.639 ccw(c-104.786,-74.084) -104.786,-74.869 ; J1.48@-105.341,-74.639 ccw(c-104.786,-74.084) -104.786,-74.869 ; CON8.2@-54.641,-29.093 ccw(c-55.803,-27.878) -54.122,-27.878 ; CON8.2@-54.641,-29.093 ccw(c-55.803,-27.878) -54.122,-27.878 ; CON8.2@-54.641,-29.093 ccw(c-55.803,-27.878) -54.122,-27.878 ; CON8.2@-54.641,-29.093 ccw(c-55.803,-27.878) -54.122,-27.878 ; CON8.2@-54.641,-29.093 ccw(c-55.803,-27.878) -54.122,-27.878 ; CON8.2@-54.537,-29.201 ccw(c-55.467,-28.229) -54.122,-28.229 ; CON8.2@-54.537,-29.201 ccw(c-55.467,-28.229) -54.122,-28.229 ; CON8.2@-54.537,-29.201 ccw(c-55.467,-28.229) -54.122,-28.229 ; CON8.2@-54.537,-29.201 ccw(c-55.467,-28.229) -54.122,-28.229 ; CON8.2@-54.537,-29.201 ccw(c-55.467,-28.229) -54.122,-28.229 ; CON8.2@-54.433,-29.31 ccw(c-55.131,-28.581) -54.122,-28.581 ; CON8.2@-54.433,-29.31 ccw(c-55.131,-28.581) -54.122,-28.581 ; CON8.2@-54.433,-29.31 ccw(c-55.131,-28.581) -54.122,-28.581 ; CON8.2@-54.433,-29.31 ccw(c-55.131,-28.581) -54.122,-28.581 ; CON8.2@-54.433,-29.31 ccw(c-55.131,-28.581) -54.122,-28.581 ; -54.122,-28.581 ccw(c-53.113,-28.581) CON8.2@-53.81,-29.31 ; -54.122,-28.581 ccw(c-53.113,-28.581) CON8.2@-53.81,-29.31 ; -54.122,-28.581 ccw(c-53.113,-28.581) CON8.2@-53.81,-29.31 ; -54.122,-28.581 ccw(c-53.113,-28.581) CON8.2@-53.81,-29.31 ; -54.122,-28.581 ccw(c-53.113,-28.581) CON8.2@-53.81,-29.31 ; -54.122,-28.229 ccw(c-52.777,-28.229) CON8.2@-53.707,-29.201 ; -54.122,-28.229 ccw(c-52.777,-28.229) CON8.2@-53.707,-29.201 ; -54.122,-28.229 ccw(c-52.777,-28.229) CON8.2@-53.707,-29.201 ; -54.122,-28.229 ccw(c-52.777,-28.229) CON8.2@-53.707,-29.201 ; -54.122,-28.229 ccw(c-52.777,-28.229) CON8.2@-53.707,-29.201 ; -54.122,-27.878 ccw(c-52.441,-27.878) CON8.2@-53.603,-29.093 ; -54.122,-27.878 ccw(c-52.441,-27.878) CON8.2@-53.603,-29.093 ; -54.122,-27.878 ccw(c-52.441,-27.878) CON8.2@-53.603,-29.093 ; -54.122,-27.878 ccw(c-52.441,-27.878) CON8.2@-53.603,-29.093 ; -54.122,-27.878 ccw(c-52.441,-27.878) CON8.2@-53.603,-29.093 ; J1.48@-105.397,-74.726 ccw(c-105.052,-74.38) -105.052,-74.869 cw(c-105.052,-74.38) J1.48@-105.397,-74.726 ; J1.48@-105.291,-75.079 cw(c-104.783,-75.587) -104.783,-74.869 ccw(c-104.783,-75.587) J1.48@-105.291,-75.079 ; J1.48@-105.291,-74.62 ccw(c-104.69,-74.018) -104.69,-74.869 cw(c-104.69,-74.018) J1.48@-105.291,-74.62
RXD1: CON9.2 J1.50 U6.12 | length 151.7
  Top Layer w0.15: U6.12@-72.712,-21.48 -70.02,-21.48 -65.122,-26.378 CON9.2@-65.122,-30.21 ; U6.12@-71.838,-21.642 cw(c-71.446,-22.035) -71.446,-21.48 ; U6.12@-71.838,-21.642 cw(c-71.446,-22.035) -71.446,-21.48 ; U6.12@-71.838,-21.642 cw(c-71.446,-22.035) -71.446,-21.48 ; U6.12@-71.838,-21.642 cw(c-71.446,-22.035) -71.446,-21.48 ; U6.12@-71.838,-21.642 cw(c-71.446,-22.035) -71.446,-21.48 ; U6.12@-71.838,-21.318 ccw(c-71.446,-20.925) -71.446,-21.48 ; U6.12@-71.838,-21.318 ccw(c-71.446,-20.925) -71.446,-21.48 ; U6.12@-71.838,-21.318 ccw(c-71.446,-20.925) -71.446,-21.48 ; U6.12@-71.838,-21.318 ccw(c-71.446,-20.925) -71.446,-21.48 ; U6.12@-71.838,-21.318 ccw(c-71.446,-20.925) -71.446,-21.48 ; CON9.2@-65.652,-29.104 ccw(c-66.934,-27.823) -65.122,-27.823 ; CON9.2@-65.652,-29.104 ccw(c-66.934,-27.823) -65.122,-27.823 ; CON9.2@-65.652,-29.104 ccw(c-66.934,-27.823) -65.122,-27.823 ; CON9.2@-65.652,-29.104 ccw(c-66.934,-27.823) -65.122,-27.823 ; CON9.2@-65.652,-29.104 ccw(c-66.934,-27.823) -65.122,-27.823 ; CON9.2@-65.546,-29.21 ccw(c-66.572,-28.185) -65.122,-28.185 ; CON9.2@-65.546,-29.21 ccw(c-66.572,-28.185) -65.122,-28.185 ; CON9.2@-65.546,-29.21 ccw(c-66.572,-28.185) -65.122,-28.185 ; CON9.2@-65.546,-29.21 ccw(c-66.572,-28.185) -65.122,-28.185 ; CON9.2@-65.546,-29.21 ccw(c-66.572,-28.185) -65.122,-28.185 ; CON9.2@-65.44,-29.317 ccw(c-66.209,-28.547) -65.122,-28.547 ; CON9.2@-65.44,-29.317 ccw(c-66.209,-28.547) -65.122,-28.547 ; CON9.2@-65.44,-29.317 ccw(c-66.209,-28.547) -65.122,-28.547 ; CON9.2@-65.44,-29.317 ccw(c-66.209,-28.547) -65.122,-28.547 ; CON9.2@-65.44,-29.317 ccw(c-66.209,-28.547) -65.122,-28.547 ; -65.122,-28.547 ccw(c-64.034,-28.547) CON9.2@-64.803,-29.317 ; -65.122,-28.547 ccw(c-64.034,-28.547) CON9.2@-64.803,-29.317 ; -65.122,-28.547 ccw(c-64.034,-28.547) CON9.2@-64.803,-29.317 ; -65.122,-28.547 ccw(c-64.034,-28.547) CON9.2@-64.803,-29.317 ; -65.122,-28.547 ccw(c-64.034,-28.547) CON9.2@-64.803,-29.317 ; -65.122,-28.185 ccw(c-63.672,-28.185) CON9.2@-64.697,-29.21 ; -65.122,-28.185 ccw(c-63.672,-28.185) CON9.2@-64.697,-29.21 ; -65.122,-28.185 ccw(c-63.672,-28.185) CON9.2@-64.697,-29.21 ; -65.122,-28.185 ccw(c-63.672,-28.185) CON9.2@-64.697,-29.21 ; -65.122,-28.185 ccw(c-63.672,-28.185) CON9.2@-64.697,-29.21 ; -65.122,-27.823 ccw(c-63.31,-27.823) CON9.2@-64.591,-29.104 ; -65.122,-27.823 ccw(c-63.31,-27.823) CON9.2@-64.591,-29.104 ; -65.122,-27.823 ccw(c-63.31,-27.823) CON9.2@-64.591,-29.104 ; -65.122,-27.823 ccw(c-63.31,-27.823) CON9.2@-64.591,-29.104 ; -65.122,-27.823 ccw(c-63.31,-27.823) CON9.2@-64.591,-29.104
  Bottom Layer w0.15: J1.50@-105.571,-76.139 -103.339,-76.139 -95.4,-68.2 -95.4,-32.1 -91.6,-28.3 -65.4,-28.3 -65.122,-28.578 ; CON9.2@-65.122,-29.643 -65.122,-28.578 ; J1.50@-105.447,-76.263 cw(c-105.148,-76.562) J1.50@-105.148,-76.139 ; J1.50@-105.447,-76.263 cw(c-105.148,-76.562) J1.50@-105.148,-76.139 ; J1.50@-105.447,-76.263 cw(c-105.148,-76.562) J1.50@-105.148,-76.139 ; J1.50@-105.447,-76.016 ccw(c-105.148,-75.717) J1.50@-105.148,-76.139 ; J1.50@-105.447,-76.016 ccw(c-105.148,-75.717) J1.50@-105.148,-76.139 ; J1.50@-105.447,-76.016 ccw(c-105.148,-75.717) J1.50@-105.148,-76.139 ; J1.50@-105.341,-76.369 cw(c-104.786,-76.924) -104.786,-76.139 ; J1.50@-105.341,-76.369 cw(c-104.786,-76.924) -104.786,-76.139 ; J1.50@-105.341,-76.369 cw(c-104.786,-76.924) -104.786,-76.139 ; J1.50@-105.341,-75.91 ccw(c-104.786,-75.355) -104.786,-76.139 ; J1.50@-105.341,-75.91 ccw(c-104.786,-75.355) -104.786,-76.139 ; J1.50@-105.341,-75.91 ccw(c-104.786,-75.355) -104.786,-76.139 ; CON9.2@-65.369,-28.927 ccw(c-65.491,-28.578) -65.122,-28.578 ; CON9.2@-65.369,-28.927 ccw(c-65.491,-28.578) -65.122,-28.578 ; CON9.2@-65.369,-28.927 ccw(c-65.491,-28.578) -65.122,-28.578 ; CON9.2@-65.369,-28.927 ccw(c-65.491,-28.578) -65.122,-28.578 ; CON9.2@-65.369,-28.927 ccw(c-65.491,-28.578) -65.122,-28.578 ; CON9.2@-65.32,-29.068 ccw(c-65.417,-28.789) -65.122,-28.789 ; CON9.2@-65.32,-29.068 ccw(c-65.417,-28.789) -65.122,-28.789 ; CON9.2@-65.32,-29.068 ccw(c-65.417,-28.789) -65.122,-28.789 ; CON9.2@-65.32,-29.068 ccw(c-65.417,-28.789) -65.122,-28.789 ; CON9.2@-65.32,-29.068 ccw(c-65.417,-28.789) -65.122,-28.789 ; -65.122,-28.789 ccw(c-64.827,-28.789) CON9.2@-64.924,-29.068 ; -65.122,-28.789 ccw(c-64.827,-28.789) CON9.2@-64.924,-29.068 ; -65.122,-28.789 ccw(c-64.827,-28.789) CON9.2@-64.924,-29.068 ; -65.122,-28.789 ccw(c-64.827,-28.789) CON9.2@-64.924,-29.068 ; -65.122,-28.789 ccw(c-64.827,-28.789) CON9.2@-64.924,-29.068 ; -65.122,-28.578 ccw(c-64.753,-28.578) CON9.2@-64.874,-28.927 ; -65.122,-28.578 ccw(c-64.753,-28.578) CON9.2@-64.874,-28.927 ; -65.122,-28.578 ccw(c-64.753,-28.578) CON9.2@-64.874,-28.927 ; -65.122,-28.578 ccw(c-64.753,-28.578) CON9.2@-64.874,-28.927 ; -65.122,-28.578 ccw(c-64.753,-28.578) CON9.2@-64.874,-28.927 ; J1.50@-105.397,-75.996 ccw(c-105.05,-75.648) -105.05,-76.139 cw(c-105.05,-75.648) J1.50@-105.397,-75.996 ; J1.50@-105.291,-76.349 cw(c-104.785,-76.855) -104.785,-76.139 ccw(c-104.785,-76.855) J1.50@-105.291,-76.349 ; J1.50@-105.291,-75.89 ccw(c-104.688,-75.286) -104.688,-76.139 cw(c-104.688,-75.286) J1.50@-105.291,-75.89
RXD2: CON10.2 J1.44 U6.9 | length 136.5
  Top Layer w0.15: v1@-76.188,-26.588 cw(c-76.349,-26.749) -76.122,-26.749 ; v1@-76.125,-26.5 cw(c-75.703,-26.5) -76.001,-26.201 ; CON10.2@-76.122,-30.21 -76.122,-26.322 -75.09,-25.29 U6.9@-72.712,-25.29 ; -76.122,-26.854 cw(c-75.746,-26.854) v1@-76.012,-26.588 ; v1@-75.975,-26.5 cw(c-75.19,-26.5) -75.745,-25.945 ; CON10.2@-76.652,-29.104 ccw(c-77.934,-27.823) -76.122,-27.823 ; CON10.2@-76.652,-29.104 ccw(c-77.934,-27.823) -76.122,-27.823 ; CON10.2@-76.652,-29.104 ccw(c-77.934,-27.823) -76.122,-27.823 ; CON10.2@-76.652,-29.104 ccw(c-77.934,-27.823) -76.122,-27.823 ; CON10.2@-76.652,-29.104 ccw(c-77.934,-27.823) -76.122,-27.823 ; CON10.2@-76.546,-29.21 ccw(c-77.572,-28.185) -76.122,-28.185 ; CON10.2@-76.546,-29.21 ccw(c-77.572,-28.185) -76.122,-28.185 ; CON10.2@-76.546,-29.21 ccw(c-77.572,-28.185) -76.122,-28.185 ; CON10.2@-76.546,-29.21 ccw(c-77.572,-28.185) -76.122,-28.185 ; CON10.2@-76.546,-29.21 ccw(c-77.572,-28.185) -76.122,-28.185 ; CON10.2@-76.44,-29.317 ccw(c-77.209,-28.547) -76.122,-28.547 ; CON10.2@-76.44,-29.317 ccw(c-77.209,-28.547) -76.122,-28.547 ; CON10.2@-76.44,-29.317 ccw(c-77.209,-28.547) -76.122,-28.547 ; CON10.2@-76.44,-29.317 ccw(c-77.209,-28.547) -76.122,-28.547 ; CON10.2@-76.44,-29.317 ccw(c-77.209,-28.547) -76.122,-28.547 ; v1@-76.224,-26.624 cw(c-76.47,-26.87) -76.122,-26.87 ; v1@-76.224,-26.624 cw(c-76.47,-26.87) -76.122,-26.87 ; v1@-76.224,-26.624 cw(c-76.47,-26.87) -76.122,-26.87 ; v1@-76.224,-26.624 cw(c-76.47,-26.87) -76.122,-26.87 ; -76.122,-28.547 ccw(c-75.034,-28.547) CON10.2@-75.803,-29.317 ; -76.122,-28.547 ccw(c-75.034,-28.547) CON10.2@-75.803,-29.317 ; -76.122,-28.547 ccw(c-75.034,-28.547) CON10.2@-75.803,-29.317 ; -76.122,-28.547 ccw(c-75.034,-28.547) CON10.2@-75.803,-29.317 ; -76.122,-28.547 ccw(c-75.034,-28.547) CON10.2@-75.803,-29.317 ; -76.122,-28.185 ccw(c-74.672,-28.185) CON10.2@-75.697,-29.21 ; -76.122,-28.185 ccw(c-74.672,-28.185) CON10.2@-75.697,-29.21 ; -76.122,-28.185 ccw(c-74.672,-28.185) CON10.2@-75.697,-29.21 ; -76.122,-28.185 ccw(c-74.672,-28.185) CON10.2@-75.697,-29.21 ; -76.122,-28.185 ccw(c-74.672,-28.185) CON10.2@-75.697,-29.21 ; -76.122,-27.823 ccw(c-74.31,-27.823) CON10.2@-75.591,-29.104 ; -76.122,-27.823 ccw(c-74.31,-27.823) CON10.2@-75.591,-29.104 ; -76.122,-27.823 ccw(c-74.31,-27.823) CON10.2@-75.591,-29.104 ; -76.122,-27.823 ccw(c-74.31,-27.823) CON10.2@-75.591,-29.104 ; -76.122,-27.823 ccw(c-74.31,-27.823) CON10.2@-75.591,-29.104 ; -76.122,-26.975 cw(c-75.625,-26.975) v1@-75.976,-26.624 ; -76.122,-26.975 cw(c-75.625,-26.975) v1@-75.976,-26.624 ; -76.122,-26.975 cw(c-75.625,-26.975) v1@-75.976,-26.624 ; -76.122,-26.975 cw(c-75.625,-26.975) v1@-75.976,-26.624 ; v1@-76.075,-26.5 cw(c-75.532,-26.5) -75.916,-26.116 ; v1@-76.075,-26.5 cw(c-75.532,-26.5) -75.916,-26.116 ; v1@-76.075,-26.5 cw(c-75.532,-26.5) -75.916,-26.116 ; v1@-76.075,-26.5 cw(c-75.532,-26.5) -75.916,-26.116 ; v1@-75.925,-26.5 cw(c-75.02,-26.5) -75.66,-25.86 ; v1@-75.925,-26.5 cw(c-75.02,-26.5) -75.66,-25.86 ; v1@-75.925,-26.5 cw(c-75.02,-26.5) -75.66,-25.86 ; v1@-75.925,-26.5 cw(c-75.02,-26.5) -75.66,-25.86 ; -73.978,-25.29 cw(c-73.978,-25.845) U6.9@-73.586,-25.452 ; -73.978,-25.29 ccw(c-73.978,-24.735) U6.9@-73.586,-25.128 ; -73.978,-25.29 cw(c-73.978,-25.845) U6.9@-73.586,-25.452 ; -73.978,-25.29 ccw(c-73.978,-24.735) U6.9@-73.586,-25.128 ; -73.978,-25.29 cw(c-73.978,-25.845) U6.9@-73.586,-25.452 ; -73.978,-25.29 ccw(c-73.978,-24.735) U6.9@-73.586,-25.128 ; -73.978,-25.29 cw(c-73.978,-25.845) U6.9@-73.586,-25.452 ; -73.978,-25.29 ccw(c-73.978,-24.735) U6.9@-73.586,-25.128 ; -73.978,-25.29 ccw(c-73.978,-24.735) U6.9@-73.586,-25.128 ; -73.978,-25.29 cw(c-73.978,-25.845) U6.9@-73.586,-25.452
  Bottom Layer w0.15: J1.44@-105.571,-72.327 -104.527,-72.327 -102.427,-72.327 -96.9,-66.8 -96.9,-30.7 -92.7,-26.5 v1(-76.1,-26.5) ; v1@-76.188,-26.588 ccw(c-76.402,-26.802) -76.402,-26.5 ccw(c-76.402,-26.198) v1@-76.188,-26.412 ; J1.44@-105.447,-72.451 cw(c-105.148,-72.749) J1.44@-105.148,-72.327 ; J1.44@-105.447,-72.451 cw(c-105.148,-72.749) J1.44@-105.148,-72.327 ; J1.44@-105.447,-72.451 cw(c-105.148,-72.749) J1.44@-105.148,-72.327 ; J1.44@-105.447,-72.203 ccw(c-105.148,-71.904) J1.44@-105.148,-72.327 ; J1.44@-105.447,-72.203 ccw(c-105.148,-71.904) J1.44@-105.148,-72.327 ; J1.44@-105.447,-72.203 ccw(c-105.148,-71.904) J1.44@-105.148,-72.327 ; J1.44@-105.341,-72.557 cw(c-104.786,-73.111) -104.786,-72.327 ; J1.44@-105.341,-72.557 cw(c-104.786,-73.111) -104.786,-72.327 ; J1.44@-105.341,-72.557 cw(c-104.786,-73.111) -104.786,-72.327 ; J1.44@-105.341,-72.097 ccw(c-104.786,-71.542) -104.786,-72.327 ; J1.44@-105.341,-72.097 ccw(c-104.786,-71.542) -104.786,-72.327 ; J1.44@-105.341,-72.097 ccw(c-104.786,-71.542) -104.786,-72.327 ; -76.522,-26.5 cw(c-76.522,-26.922) v1@-76.224,-26.624 ; -76.522,-26.5 ccw(c-76.522,-26.078) v1@-76.224,-26.376 ; -76.522,-26.5 cw(c-76.522,-26.922) v1@-76.224,-26.624 ; -76.522,-26.5 ccw(c-76.522,-26.078) v1@-76.224,-26.376 ; -76.522,-26.5 cw(c-76.522,-26.922) v1@-76.224,-26.624 ; -76.522,-26.5 ccw(c-76.522,-26.078) v1@-76.224,-26.376 ; -76.522,-26.5 ccw(c-76.522,-26.078) v1@-76.224,-26.376 ; -76.522,-26.5 cw(c-76.522,-26.922) v1@-76.224,-26.624 ; J1.44@-105.397,-72.186 ccw(c-105.056,-71.845) -105.056,-72.327 cw(c-105.056,-71.845) J1.44@-105.397,-72.186 ; J1.44@-105.291,-72.539 cw(c-104.778,-73.052) -104.778,-72.327 ccw(c-104.778,-73.052) J1.44@-105.291,-72.539 ; J1.44@-105.291,-72.08 ccw(c-104.694,-71.482) -104.694,-72.327 cw(c-104.694,-71.482) J1.44@-105.291,-72.08
SDCLK: CON6.5 J2.76 RA7.5 | length 70.6
  Top Layer w0.15: J2.76@-145.703,-92.661 -128.861,-92.661 -128.203,-92.003 CON6.5@-128.203,-88.729 -128.203,-83.903 -126.844,-82.544 RA7.5@-122.909,-82.544 ; J2.76@-145.579,-92.785 cw(c-145.28,-93.083) J2.76@-145.28,-92.661 ; J2.76@-145.579,-92.785 cw(c-145.28,-93.083) J2.76@-145.28,-92.661 ; J2.76@-145.579,-92.785 cw(c-145.28,-93.083) J2.76@-145.28,-92.661 ; J2.76@-145.579,-92.537 ccw(c-145.28,-92.238) J2.76@-145.28,-92.661 ; J2.76@-145.579,-92.537 ccw(c-145.28,-92.238) J2.76@-145.28,-92.661 ; J2.76@-145.579,-92.537 ccw(c-145.28,-92.238) J2.76@-145.28,-92.661 ; J2.76@-145.473,-92.891 cw(c-144.918,-93.446) -144.918,-92.661 ; J2.76@-145.473,-92.891 cw(c-144.918,-93.446) -144.918,-92.661 ; J2.76@-145.473,-92.891 cw(c-144.918,-93.446) -144.918,-92.661 ; J2.76@-145.473,-92.431 ccw(c-144.918,-91.876) -144.918,-92.661 ; J2.76@-145.473,-92.431 ccw(c-144.918,-91.876) -144.918,-92.661 ; J2.76@-145.473,-92.431 ccw(c-144.918,-91.876) -144.918,-92.661 ; CON6.5@-128.504,-89.529 cw(c-129.229,-90.255) -128.203,-90.255 ; CON6.5@-128.504,-89.529 cw(c-129.229,-90.255) -128.203,-90.255 ; CON6.5@-128.504,-89.529 cw(c-129.229,-90.255) -128.203,-90.255 ; CON6.5@-128.504,-89.529 cw(c-129.229,-90.255) -128.203,-90.255 ; CON6.5@-128.504,-89.529 cw(c-129.229,-90.255) -128.203,-90.255 ; CON6.5@-128.504,-87.928 ccw(c-129.229,-87.203) -128.203,-87.203 ; CON6.5@-128.504,-87.928 ccw(c-129.229,-87.203) -128.203,-87.203 ; CON6.5@-128.504,-87.928 ccw(c-129.229,-87.203) -128.203,-87.203 ; CON6.5@-128.504,-87.928 ccw(c-129.229,-87.203) -128.203,-87.203 ; CON6.5@-128.504,-87.928 ccw(c-129.229,-87.203) -128.203,-87.203 ; CON6.5@-128.397,-89.423 cw(c-128.867,-89.893) -128.203,-89.893 ; CON6.5@-128.397,-89.423 cw(c-128.867,-89.893) -128.203,-89.893 ; CON6.5@-128.397,-89.423 cw(c-128.867,-89.893) -128.203,-89.893 ; CON6.5@-128.397,-89.423 cw(c-128.867,-89.893) -128.203,-89.893 ; CON6.5@-128.397,-89.423 cw(c-128.867,-89.893) -128.203,-89.893 ; CON6.5@-128.397,-88.034 ccw(c-128.867,-87.565) -128.203,-87.565 ; CON6.5@-128.397,-88.034 ccw(c-128.867,-87.565) -128.203,-87.565 ; CON6.5@-128.397,-88.034 ccw(c-128.867,-87.565) -128.203,-87.565 ; CON6.5@-128.397,-88.034 ccw(c-128.867,-87.565) -128.203,-87.565 ; CON6.5@-128.397,-88.034 ccw(c-128.867,-87.565) -128.203,-87.565 ; -128.203,-90.255 cw(c-127.177,-90.255) CON6.5@-127.902,-89.529 ; -128.203,-90.255 cw(c-127.177,-90.255) CON6.5@-127.902,-89.529 ; -128.203,-90.255 cw(c-127.177,-90.255) CON6.5@-127.902,-89.529 ; -128.203,-90.255 cw(c-127.177,-90.255) CON6.5@-127.902,-89.529 ; -128.203,-90.255 cw(c-127.177,-90.255) CON6.5@-127.902,-89.529 ; -128.203,-89.893 cw(c-127.539,-89.893) CON6.5@-128.009,-89.423 ; -128.203,-89.893 cw(c-127.539,-89.893) CON6.5@-128.009,-89.423 ; -128.203,-89.893 cw(c-127.539,-89.893) CON6.5@-128.009,-89.423 ; -128.203,-89.893 cw(c-127.539,-89.893) CON6.5@-128.009,-89.423 ; -128.203,-89.893 cw(c-127.539,-89.893) CON6.5@-128.009,-89.423 ; -128.203,-87.565 ccw(c-127.539,-87.565) CON6.5@-128.009,-88.034 ; -128.203,-87.565 ccw(c-127.539,-87.565) CON6.5@-128.009,-88.034 ; -128.203,-87.565 ccw(c-127.539,-87.565) CON6.5@-128.009,-88.034 ; -128.203,-87.565 ccw(c-127.539,-87.565) CON6.5@-128.009,-88.034 ; -128.203,-87.565 ccw(c-127.539,-87.565) CON6.5@-128.009,-88.034 ; -128.203,-87.203 ccw(c-127.177,-87.203) CON6.5@-127.902,-87.928 ; -128.203,-87.203 ccw(c-127.177,-87.203) CON6.5@-127.902,-87.928 ; -128.203,-87.203 ccw(c-127.177,-87.203) CON6.5@-127.902,-87.928 ; -128.203,-87.203 ccw(c-127.177,-87.203) CON6.5@-127.902,-87.928 ; -128.203,-87.203 ccw(c-127.177,-87.203) CON6.5@-127.902,-87.928 ; -123.331,-82.544 cw(c-123.331,-82.966) RA7.5@-123.033,-82.667 ; -123.331,-82.544 ccw(c-123.331,-82.121) RA7.5@-123.033,-82.42 ; -123.331,-82.544 cw(c-123.331,-82.966) RA7.5@-123.033,-82.667 ; -123.331,-82.544 ccw(c-123.331,-82.121) RA7.5@-123.033,-82.42 ; -123.331,-82.544 cw(c-123.331,-82.966) RA7.5@-123.033,-82.667 ; -123.331,-82.544 ccw(c-123.331,-82.121) RA7.5@-123.033,-82.42 ; -123.331,-82.544 cw(c-123.331,-82.966) RA7.5@-123.033,-82.667 ; -123.331,-82.544 ccw(c-123.331,-82.121) RA7.5@-123.033,-82.42 ; -123.331,-82.544 ccw(c-123.331,-82.121) RA7.5@-123.033,-82.42 ; -123.331,-82.544 cw(c-123.331,-82.966) RA7.5@-123.033,-82.667 ; J2.76@-145.529,-92.506 ccw(c-145.154,-92.131) -145.154,-92.661 cw(c-145.154,-92.131) J2.76@-145.529,-92.506 ; J2.76@-145.423,-92.859 cw(c-144.944,-93.338) -144.944,-92.661 ccw(c-144.944,-93.338) J2.76@-145.423,-92.859 ; J2.76@-145.423,-92.399 ccw(c-144.792,-91.768) -144.792,-92.661 cw(c-144.792,-91.768) J2.76@-145.423,-92.399